# EAGLE board EGB240_Template_75x50mm (EAGLE 7.5.0)
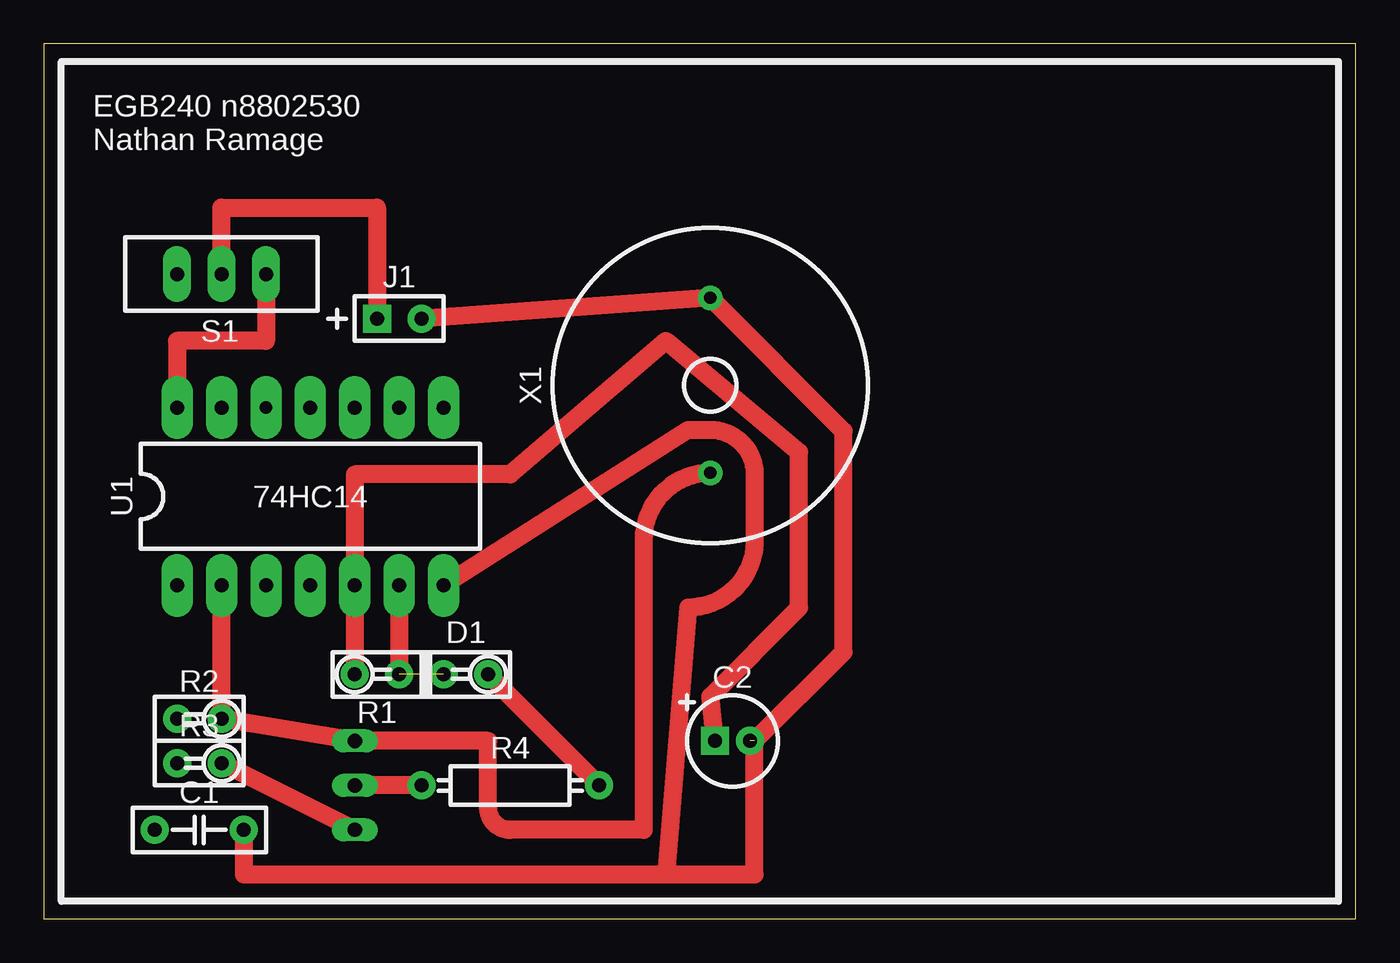
[diagram p0: board, top side]
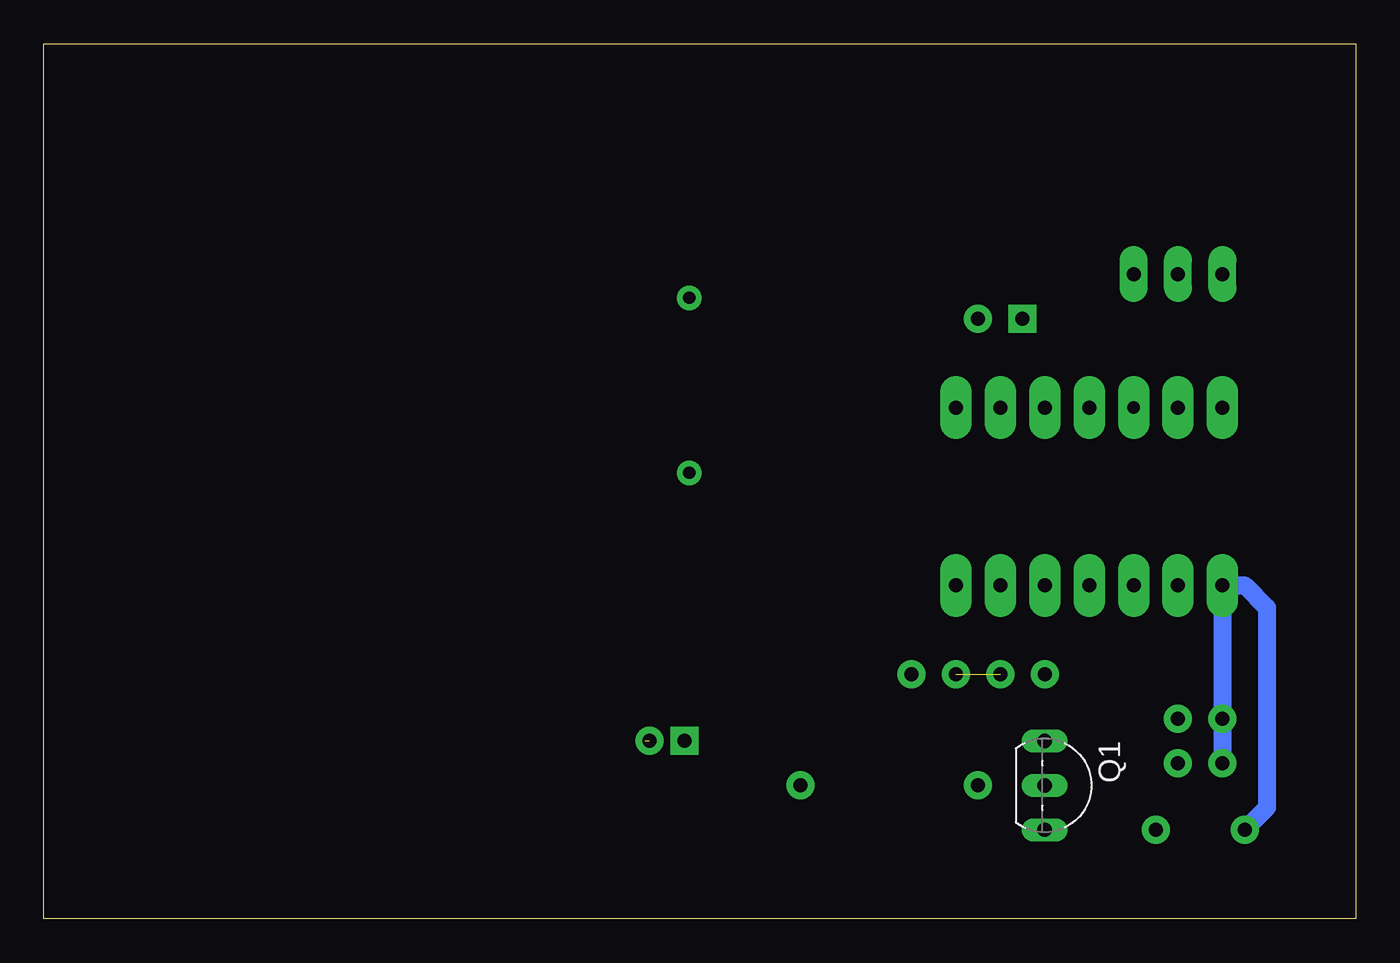
[diagram p1: board, bottom side, seen from below]

Size 75 x 50 mm. Coordinates in mm from the lower left corner, seen from the top.
Outline: 0,0 75,0 75,50 0,50 0,0
Copper layers (1*16): Top 0.035mm / dielectric 1.5mm / Bottom 0.035mm
Design rules "default *": minimum track width 10mil, minimum drill 20mil, track to track 10mil, track to pad 10mil, pad to pad 10mil, via to via 10mil, smd to smd 8mil, copper to edge 1mm, drill to drill 20mil, minimum pad ring 10mil, minimum via ring 8mil, stop-mask expansion 4mil, vias tented up to drill 0mil, thermal gap 10mil
bKeepout: 4 lines

## Footprints (pad centres in the part's own frame; a part is rotated, then mirrored left to right if it is on the bottom)
CAP-DISC-P5.08 = drill 0.8 pad 1.6: P$1 -2.54,0; P$2 2.54,0
CAP-RB-P2.0-D5.0 = drill 0.8 pad 1.6 square: P$1 -1,0 | drill 0.8 pad 1.6: P$2 1,0
DO35-P2.54 = drill 0.8 pad 1.6: A 1.27,0; K -1.27,0
BATT-3V = drill 0.8 pad 1.6 square: P$1 -1.27,0 | drill 0.8 pad 1.6: P$2 1.27,0
TO92-CBE = drill 0.813 long: B 0,0; C 2.54,0; E -2.54,0
AXIAL-P2.54 = drill 0.8 pad 1.6: P$1 -1.27,0; P$2 1.27,0
AXIAL-P10.16 = drill 0.8 pad 1.6: P$1 -5.08,0; P$2 5.08,0
SS-12 = drill 0.8 pad 1.6 long: 1 0,2.54; 2 0,0; 3 0,-2.54
DIP-14 = drill 0.8 pad 1.8 long: P$1 -5.08,7.62; P$2 -5.08,5.08; P$3 -5.08,2.54; P$4 -5.08,0; P$5 -5.08,-2.54; P$6 -5.08,-5.08; P$7 -5.08,-7.62; P$8 5.08,-7.62; P$9 5.08,-5.08; P$10 5.08,-2.54; P$11 5.08,0; P$13 5.08,5.08; P$14 5.08,7.62 | drill 0.7 pad 1.8 long: P$12 5.08,2.54
PS1720P02 = drill 0.7 pad 1.4: P$1 -5,0; P$2 5,0

## Placement (x,y rotation side)
C1  [CAP-DISC-P5.08]  8.89,5.08 0 top
C2  [CAP-RB-P2.0-D5.0]  39.37,10.16 0 top
D1  [DO35-P2.54]  24.13,13.97 0 top
J1  [BATT-3V]  20.32,34.29 0 top
Q1  2N4126  [TO92-CBE]  17.78,7.62 270 bottom
R1  [AXIAL-P2.54]  19.05,13.97 180 top
R2  [AXIAL-P2.54]  8.89,11.43 0 top
R3  [AXIAL-P2.54]  8.89,8.89 0 top
R4  [AXIAL-P10.16]  26.67,7.62 0 top
S1  [SS-12]  10.16,36.83 90 top
U1  74HC14  [DIP-14]  15.24,24.13 90 top
X1  [PS1720P02]  38.1,30.48 90 top

## Library data of the parts
C1 C2 D1 J1 R1-R4 S1 U1 X1 = EGB240
Q1 = transistor-pnp

## Nets
+3V: S1.3 U1.P$14
GND: C1.P$2 C2.P$2 J1.P$2 U1.P$7 X1.P$2
N$1: C2.P$1 R1.P$2 U1.P$5
N$2: D1.K R1.P$1 U1.P$6
N$3: D1.A R4.P$2
N$4: Q1.B R4.P$1
N$5: Q1.C R3.P$2
N$6: C1.P$1 R2.P$1 R3.P$1 U1.P$1
N$7: Q1.E R2.P$2 U1.P$2 X1.P$1
N$8: J1.P$1 S1.2

## Tracks (layer width: path | path; a pad name or v marks a point on that pad's centre or on a via)
+3V
  Top 1.016: S1.3 12.7,33.02 7.62,33.02 U1.P$14
GND  (1 unrouted)
  Top 1.016: C1.P$2 11.43,2.54 35.56,2.54 | 35.56,2.54 40.64,2.54 40.64,10.16 45.72,15.24 45.72,27.86 X1.P$2 J1.P$2 | U1.P$7 36.83,27.94 38.1,27.94 arc-90 40.64,25.4 40.64,21.59 arc-90 36.83,17.78 35.56,2.54
N$1
  Top 1.016: R1.P$2 U1.P$5 17.78,25.4 26.67,25.4 35.56,33.02 43.18,26.67 43.18,17.78 38.1,12.7 C2.P$1
N$2  (1 unrouted)
  Top 1.016: U1.P$6 R1.P$1
N$3
  Top 1.016: R4.P$2 D1.A
N$4
  Top 1.016: R4.P$1 Q1.B
N$5
  Top 1.016: Q1.C R3.P$2
N$6
  Bottom 1.016: R3.P$1 R2.P$1 U1.P$1 6.35,19.05 5.08,17.78 5.08,6.35 C1.P$1
N$7
  Top 1.016: U1.P$2 R2.P$2 Q1.E 25.4,10.16 25.4,6.35 arc90 26.67,5.08 34.29,5.08 34.29,21.67 arc-90 X1.P$1
N$8
  Top 1.016: S1.2 10.16,40.64 19.05,40.64 J1.P$1

## Text on the board
tPlace: EGB240 n8802530 / Nathan Ramage